# Allegro board PROIECT-CEF2_.brd
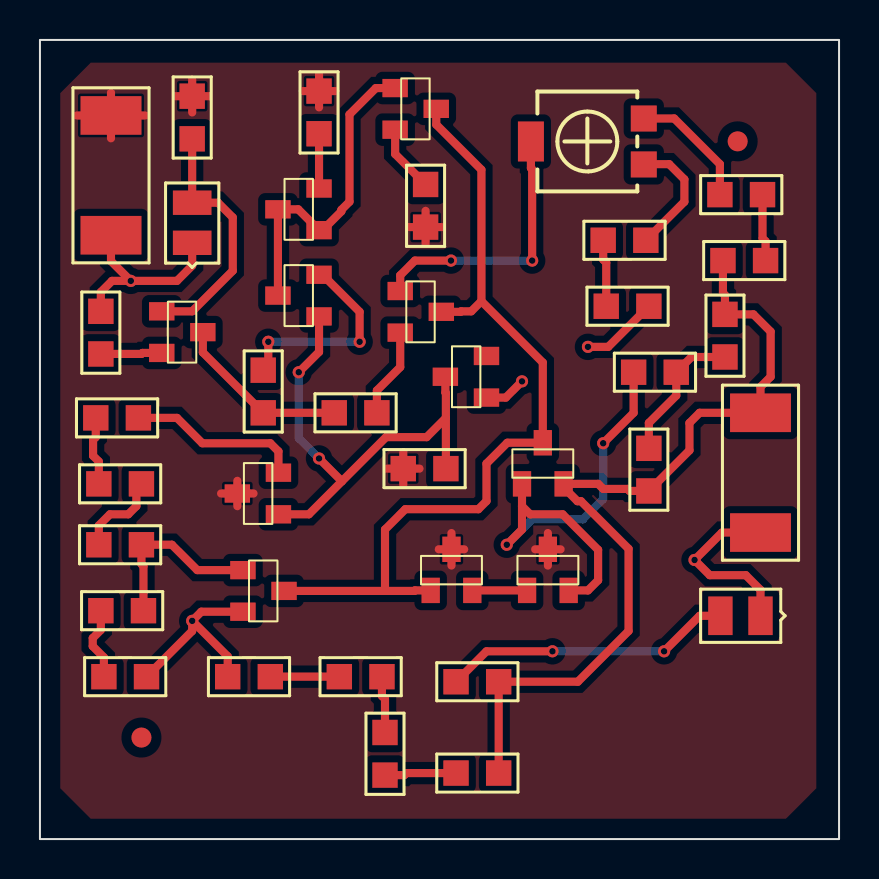
[diagram p0: board, top side]
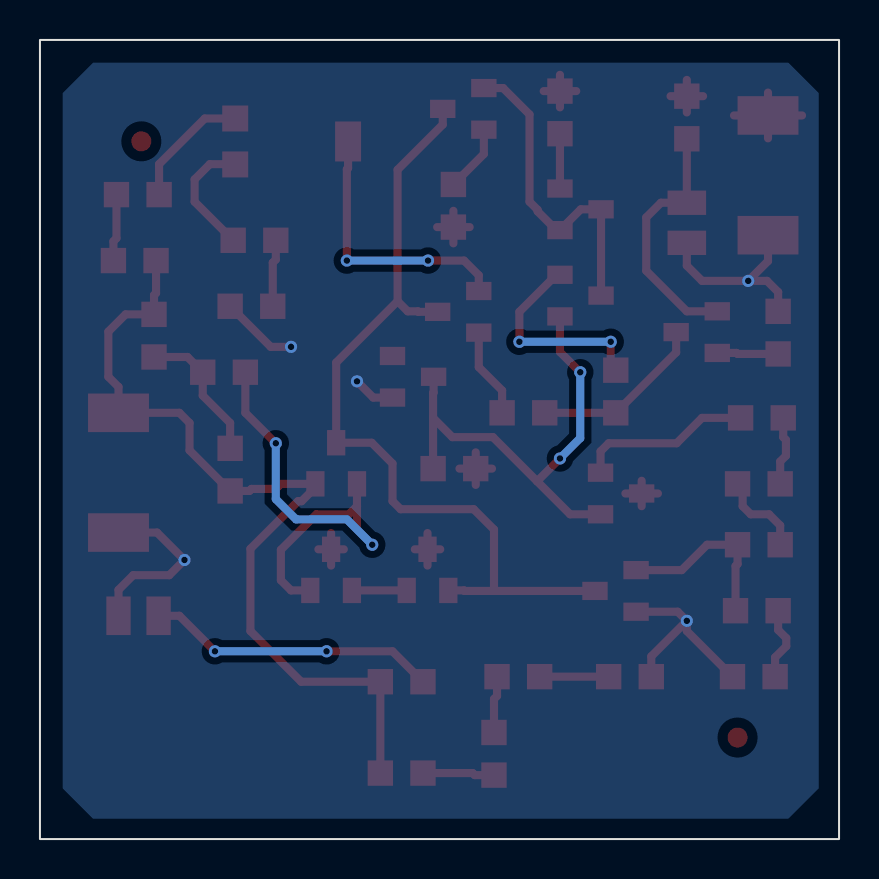
[diagram p1: board, bottom side, seen from below]

Outline 40 x 40 mm; copper layers: TOP, BOTTOM. Coordinates in mm from the lower left corner of the outline.
Outline path: rectangle 0,0 40,40

## Design rules (mm)
nets with their own width: min track width 0.406; nets GND N00244 N00248 N00280 N00836 N00920 N01270 N01633 N01641 N04894 N07409 N13888 N16734 N17604 N17608 N17612 N21853 N22111 N22121 N22314 N22465 N22652 N22662 N23262 N23600 N25769 N26390 N33961 VIN VOUT

## Placement (name value [footprint] x y rotation side)
D5  D1N4148  [SMD080512]  36.07 11.18 180 top
D6  D1N4148  [SMD080512]  7.62 29.84 90 top
D7  BZX84-C2V7  [TO236AA]  22.35 22.1 0 top
J1  CON2  [SMR2512]  3.56 30.23 90 top
J2  CON2  [SMR2512]  36.07 21.34 270 top
NOREF  -  [unnamed]  5.08 5.08 0 top
NOREF#2  -  [unnamed]  34.92 34.92 0 top
Q1  QBC856B  [TO236AA]  13.97 30.48 0 top
Q2  QBC856B  [TO236AA]  17.78 37.59 180 top
Q3  QBC846B  [TO236AA]  13.97 26.16 0 top
Q4  QBC846B  [TO236AA]  18.03 27.43 180 top
Q5  QBC846B  [TO236AA]  6.1 26.42 180 top
Q8  QBC817-25  [TO236AA]  11.94 16.26 0 top
Q9  QBC817-25  [TO236AA]  10.16 13.46 180 top
Q10  QBC846B  [TO236AA]  24.13 17.78 270 top
Q11  QBC846B  [TO236AA]  19.56 12.45 270 top
Q12  QBC846B  [TO236AA]  24.38 12.45 270 top
R1  2K  [SMR0805]  7.62 35.05 90 top
R2  1.5k  [SMR0805]  20.32 18.54 180 top
R3  100  [SMR0805]  13.97 35.31 90 top
R4  100  [SMR0805]  19.3 32.77 270 top
R5  100  [SMR0805]  11.18 21.34 90 top
R6  100  [SMR0805]  14.73 21.34 0 top
R7  1.5k  [SMR0805]  2.79 21.08 0 top
R8  150  [SMR0805]  5.08 17.78 180 top
R9  100  [SMR0805]  5.08 14.73 180 top
R10  330  [SMR0805]  3.05 11.43 0 top
R11  68  [SMR0805]  5.33 8.13 180 top
R12  51  [SMR0805]  3.05 26.42 270 top
R13  1  [SMR0805]  29.72 23.37 0 top
R14  0.47  [SMR0805]  34.29 24.13 90 top
R15  0.47  [SMR0805]  30.48 19.56 270 top
R16  1k  [SMR0805]  36.32 28.96 180 top
R17  100  [SMR0805]  34.04 32.26 0 top
R18  5k  [TS53YL]  30.23 36.07 0 top
R19  3.9k  [SMR0805]  28.19 29.97 0 top
R20  1k  [SMR0805]  30.48 26.67 180 top
R21  1k  [SMR0805]  20.83 7.87 0 top
R22  100  [SMR0805]  20.83 3.3 0 top
R23  100  [SMR0805]  17.27 5.33 270 top
R24  22  [SMR0805]  14.99 8.13 0 top
R25  22  [SMR0805]  9.4 8.13 0 top

## Library data of the parts
D5 D6 = 1N4148_0
D7 = BZX84-C2V7_1
J1 J2 = CON2
Q1 Q2 = QBC856B_0
Q3 Q5 Q10 Q11 = QBC846B_1
Q4 = QBC846B_0
Q8 Q9 = QBC817-25_0
Q12 = QBC846B_2
R1-R17 R19-R25 = R
R18 = POT

## Footprints (pads in the part's own frame, mm; a bottom-side part is the same pattern mirrored in y, then rotated)
SMD080512
  rect 1.219x1.93 smd: 1(0,0) 2(2.007,0)
SMR0805
  rect 1.27x1.27 smd: 1(0,0) 2(2.134,0)
SMR2512
  rect 1.93x3.048 smd: 1(0,0) 2(5.994,0)
TO236AA
  rect 1.27x0.914 smd: 1(0,0) 2(0,2.083) 3(-2.057,1.041)
TS53YL
  rect 1.3x1.3 smd: 1(0,0) 3(0,-2.3)
  rect 1.3x2 smd: 2(-5.65,-1.15)
unnamed
  round 1 smd: (0,0)

## Nets
GND: D5.1(2) D6.1(2) D7.1 J1.1 J2.2 Q9.2(E) R11.1 R12.1 R20.1 R25.1
VIN: J1.2 Q8.3 Q11.3 Q12.3 R1.2 R2.2 R3.2 R4.2
VOUT: J2.1 Q10.2(E) R14.2 R15.2 R16.2 R21.2 R22.2
N00244: Q1.2(E) R3.1
N00248: D7.3 Q3.1 Q8.1 R2.1
N00280: Q2.2(E) R4.1
N00836: Q2.3 Q4.3 Q9.3 Q10.3 Q11.1
N00920: Q5.3 R5.1 R6.1
N01270: R10.1 R11.2
N01633: R17.1 R18.1
N01641: R16.1 R17.2
N04894: R18.3 R19.2
N07409: D6.2 Q5.1 R1.1
N13888: D5.2 R21.1
N16734: R19.1 R20.2
N17604: R24.1 R25.2
N17608: R23.1 R24.2
N17612: R22.1 R23.2
N21853: Q1.1 Q1.3 Q2.1 Q3.3
N22111: Q4.2(E) R6.2
N22121: Q3.2(E) R5.2
N22314: Q5.2(E) R12.2
N22465: Q10.1 Q12.2(E) R13.1
N22652: Q9.1 R9.1 R10.2
N22662: Q8.2(E) R7.2
N23262: R7.1 R8.2
N23600: R8.1 R9.2
N25769: R13.2 R14.1 R15.1
N26390: Q4.1 R18.2(T)
N33961: Q11.2(E) Q12.1

Pads without a net: D7 2

## Via types
v1: diameter 0.61, hole 0.33, TOP to BOTTOM, 15 vias

## Routing (per net, layer and track width the routed paths; a pad name or vN(x,y) marks a point on that pad's centre or on a via; arc(x,y) is an arc through that point)
GND: length 35
  TOP w0.406: R25.1 9.4,9.14 v1(7.62,10.92) ; v1(4.55,27.94) 3.56,28.93 J1.1 ; v1(4.55,27.94) 6.86,27.94 7.62,28.7 D6.1 ; v1(4.55,27.94) 3.61,27.94 3.05,27.38 R12.1 ; v1(7.62,10.92) 8.08,11.38 Q9.2 ; v1(7.62,10.92) 7.62,10.41 R11.1 ; R20.1 28.45,24.64 v1(27.43,24.64) ; J2.2 34.14,15.34 v1(32.77,13.97) 33.53,13.21 35.33,13.21 36.07,12.47 D5.1 ; D7.1 23.32,22.1 v1(24.13,22.91)
VIN: length 27.4
  TOP w0.406: R1.2 7.62,38 ; R1.2 6.81,37.19 ; R1.2 7.62,36.37 ; R1.2 8.43,37.19 ; 25.43,13.69 Q12.3 ; Q12.3 26.06,14.5 ; Q12.3 24.79,14.5 ; Q12.3 25.43,15.32 ; 9.07,17.3 Q8.3 ; Q8.3 9.88,17.93 ; Q8.3 10.69,17.3 ; Q8.3 9.88,16.66 ; 1.85,36.22 J1.2 ; J1.2 3.56,35.08 ; J1.2 5.26,36.22 ; J1.2 3.56,37.36 ; R2.2 18.19,19.36 ; R2.2 17.37,18.54 ; R2.2 18.19,17.73 ; R2.2 19,18.54 ; 13.16,37.44 R3.2 ; R3.2 13.97,36.63 ; R3.2 13.97,38.25 ; R3.2 14.78,37.44 ; R4.2 19.3,31.45 ; R4.2 19.3,29.82 ; R4.2 18.49,30.63 ; R4.2 20.12,30.63 ; Q11.3 20.6,15.32 ; Q11.3 21.23,14.5 ; Q11.3 20.6,13.69 ; Q11.3 19.96,14.5
VOUT: length 43
  TOP w0.406: R22.2 R21.2 26.92,7.87 29.46,10.41 29.46,14.53 27.08,16.91 26.9,16.91 26.21,17.6 Q10.2 27.94,17.78 28.19,17.53 29.41,17.53 29.51,17.42 R15.2 32.51,19.46 32.51,20.83 33.02,21.34 J2.1 36.07,22.63 36.58,23.14 36.58,25.4 35.71,26.26 R14.2 34.29,27.23 34.19,27.33 R16.2
N00244: length 2.7
  TOP w0.406: R3.1 Q1.2
N00248: length 24.6
  TOP w0.406: v1(13.97,19.05) 15.11,17.91 ; 15.11,17.91 17.32,20.12 19.36,20.12 20.32,21.08 ; 15.11,17.91 13.46,16.26 Q8.1 ; 20.32,21.08 20.32,22.33 20.29,22.35 D7.3 ; 20.32,21.08 R2.1 ; v1(12.95,23.37) 13.97,24.38 Q3.1
  BOTTOM w0.406: v1(13.97,19.05) 12.95,20.07 v1(12.95,23.37)
N00280: length 3.4
  TOP w0.406: R4.1 17.78,34.29 Q2.2
N00836: length 42.4
  TOP w0.406: Q9.3 17.27,12.42 ; 17.27,12.42 18.75,12.42 18.77,12.45 Q11.1 ; 17.27,12.42 17.27,15.49 18.29,16.51 21.95,16.51 22.35,16.92 22.35,18.8 23.39,19.84 Q10.3 25.17,23.85 22.1,26.92 ; 22.1,26.92 21.59,26.42 21.08,26.42 21.06,26.39 Q4.3 ; 22.1,26.92 22.1,33.5 19.84,35.76 Q2.3
N00920: length 8.8
  TOP w0.406: R6.1 R5.1 8.15,24.36 Q5.3
N01270: length 3.7
  TOP w0.406: R11.2 3.2,9.09 2.64,9.65 2.64,10.06 3.05,10.46 R10.1
N01633: length 6.3
  TOP w0.406: R18.1 31.75,36.07 34.04,33.78 R17.1
N01641: length 3.4
  TOP w0.406: R16.1 36.32,29.92 36.17,30.07 R17.2
N04894: length 6.2
  TOP w0.406: R19.2 32.26,31.9 32.26,33.02 31.5,33.78 30.24,33.78 R18.3
N07409: length 12.6
  TOP w0.406: Q5.1 7.62,26.42 9.65,28.45 9.65,31.11 8.92,31.85 D6.2 R1.1
N13888: length 14.6
  TOP w0.406: D5.2 33.02,11.18 v1(31.24,9.4) ; R21.1 22.35,9.4 v1(25.65,9.4)
  BOTTOM w0.406: v1(31.24,9.4) v1(25.65,9.4)
N16734: length 3.4
  TOP w0.406: R20.2 28.35,28.85 28.19,29.01 R19.1
N17604: length 3.5
  TOP w0.406: R24.1 R25.2
N17608: length 2.9
  TOP w0.406: R24.2 17.12,7.16 17.27,7.01 R23.1
N17612: length 3.6
  TOP w0.406: R23.2 18.24,3.2 18.34,3.3 R22.1
N21853: length 16.2
  TOP w0.406: Q2.1 16.81,37.59 15.49,36.27 15.49,31.9 15.09,31.5 15.09,31.42 14.15,30.48 Q1.1 12.93,31.52 Q1.3 Q3.3
N22111: length 4.5
  TOP w0.406: Q4.2 18.03,23.62 16.87,22.45 R6.2
N22121: length 10.4
  TOP w0.406: R5.2 11.43,23.72 v1(11.43,24.89) ; Q3.2 14.15,28.24 16,26.39 v1(16,24.89)
  BOTTOM w0.406: v1(16,24.89) v1(11.43,24.89)
N22314: length 3.1
  TOP w0.406: R12.2 5.08,24.28 5.13,24.33 Q5.2
N22465: length 24
  TOP w0.406: v1(23.37,14.73) 24.13,15.49 24.13,16.66 ; 24.13,16.66 24.54,16.26 26.16,16.26 27.94,14.48 27.94,12.95 27.43,12.45 Q12.2 ; 24.13,16.66 Q10.1 ; R13.1 29.72,21.34 v1(28.19,19.81)
  BOTTOM w0.406: v1(28.19,19.81) 28.19,17.02 27.18,16 24.64,16 v1(23.37,14.73)
N22652: length 9
  TOP w0.406: R10.2 5.18,13.67 5.08,13.77 R9.1 6.6,14.73 7.87,13.46 Q9.1
N22662: length 8.8
  TOP w0.406: Q8.2 11.94,19.41 11.53,19.81 8.13,19.81 6.86,21.08 R7.2
N23262: length 3.5
  TOP w0.406: R7.1 2.79,20.12 2.66,19.98 2.66,19.19 2.95,18.9 R8.2
N23600: length 4.5
  TOP w0.406: R9.2 2.95,15.7 3.51,16.26 4.42,16.26 4.83,16.66 4.83,17.53 R8.1
N25769: length 7.1
  TOP w0.406: R14.1 32.61,24.13 R13.2 31.85,22.2 30.48,20.83 R15.1
N26390: length 13.7
  TOP w0.406: R18.2 24.58,33.59 24.64,33.53 v1(24.64,28.96) ; Q4.1 18.03,28.22 18.77,28.96 v1(20.57,28.96)
  BOTTOM w0.406: v1(20.57,28.96) v1(24.64,28.96)
N33961: length 2.7
  TOP w0.406: Q11.2 Q12.1

## Copper pours and planes (outline as drawn; the poured copper is in the pictures)
GND on BOTTOM: 1.02,37.34 2.54,38.86 37.34,38.86 38.86,37.34 38.86,2.54 37.34,1.02 2.54,1.02 1.02,2.54
VIN on TOP: 2.54,1.02 1.02,2.54 1.02,37.34 2.54,38.86 37.34,38.86 38.86,37.34 38.86,2.54 37.34,1.02 ; 4 cut-outs
